# Altium PCB PCB1.pcbdoc
Units mil, origin at the board's own origin, x right, y up, seen from the top; angles counter-clockwise.
Board outline 3030 x 3680 mil, 2 copper layers (Top Layer, Bottom Layer); 7 components, 22 nets, 99 pads, 0 vias.
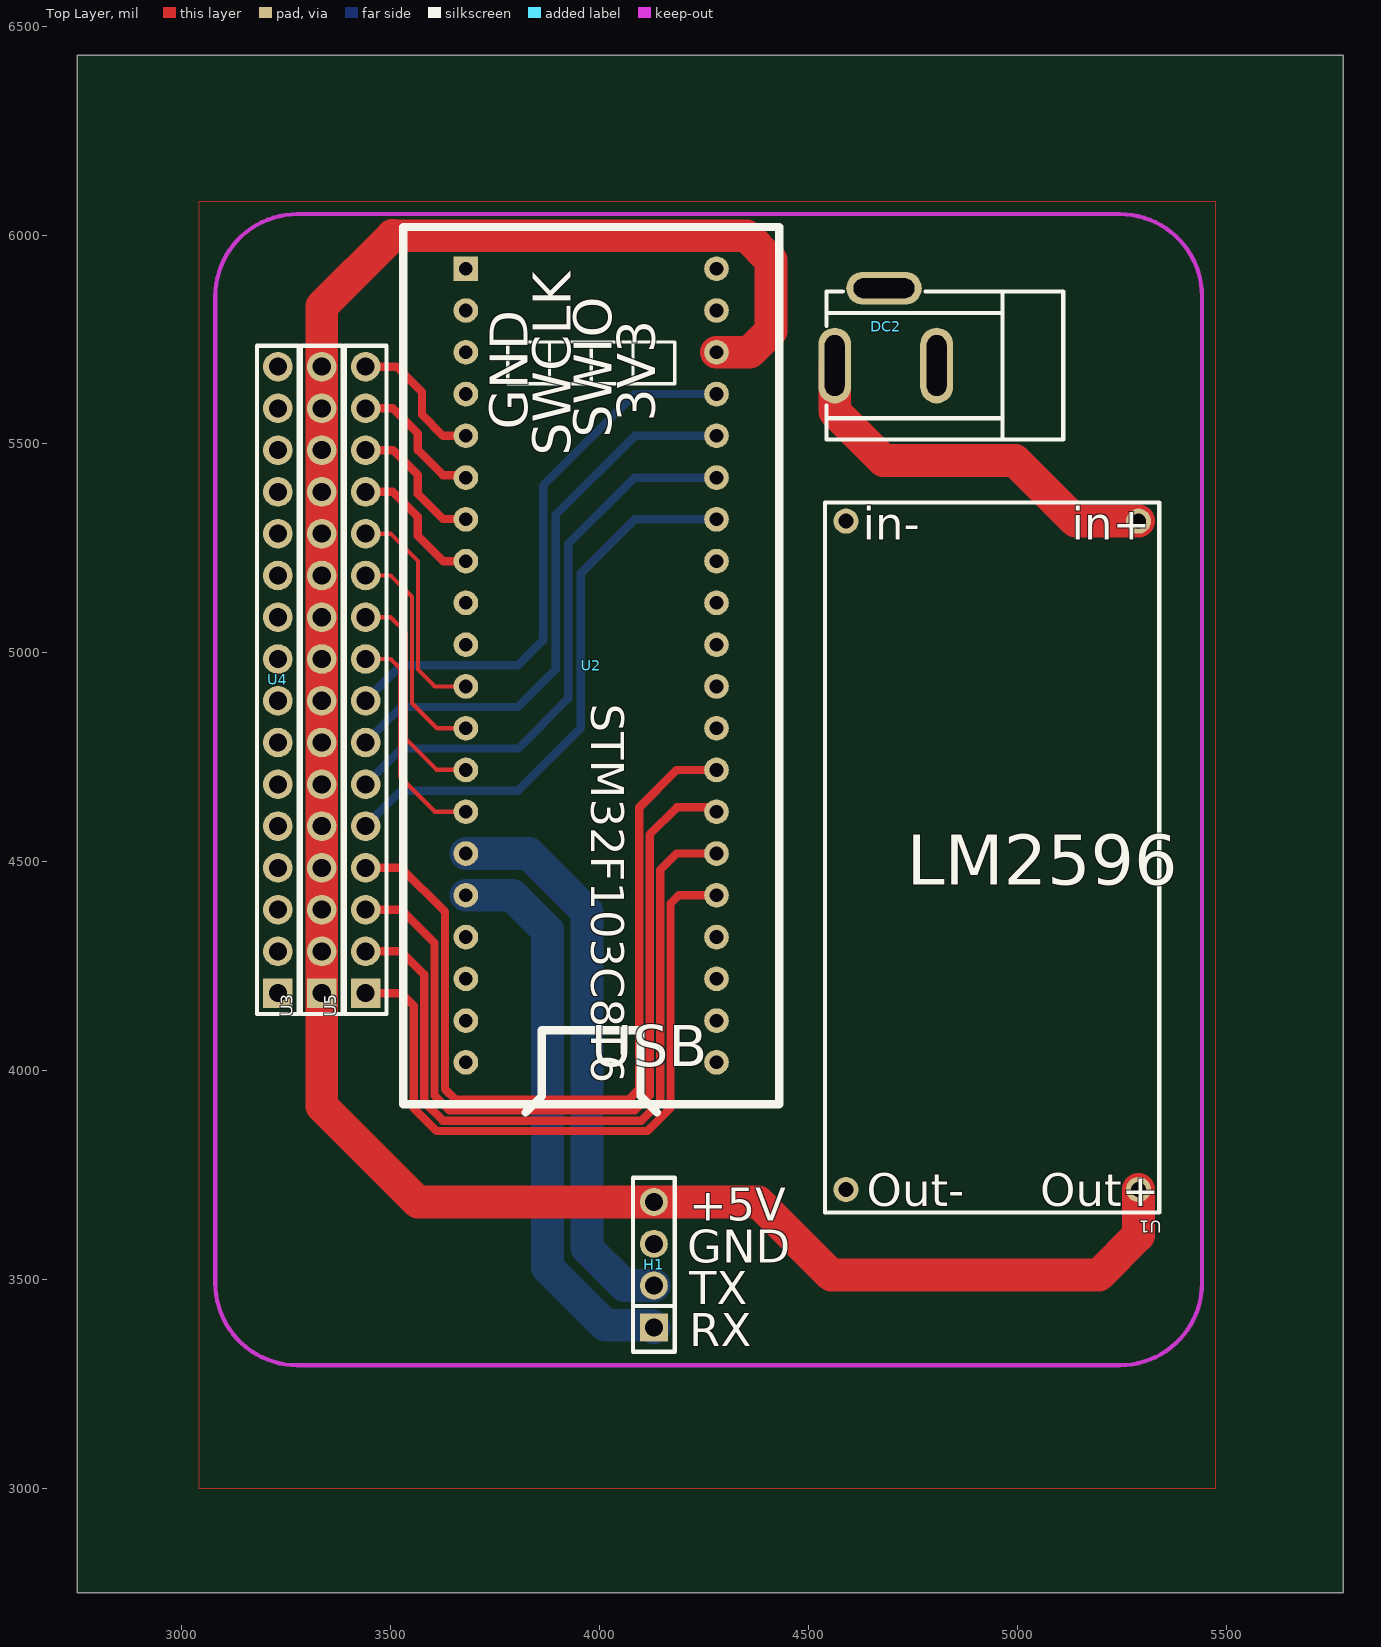
[diagram p0: Top Layer view]
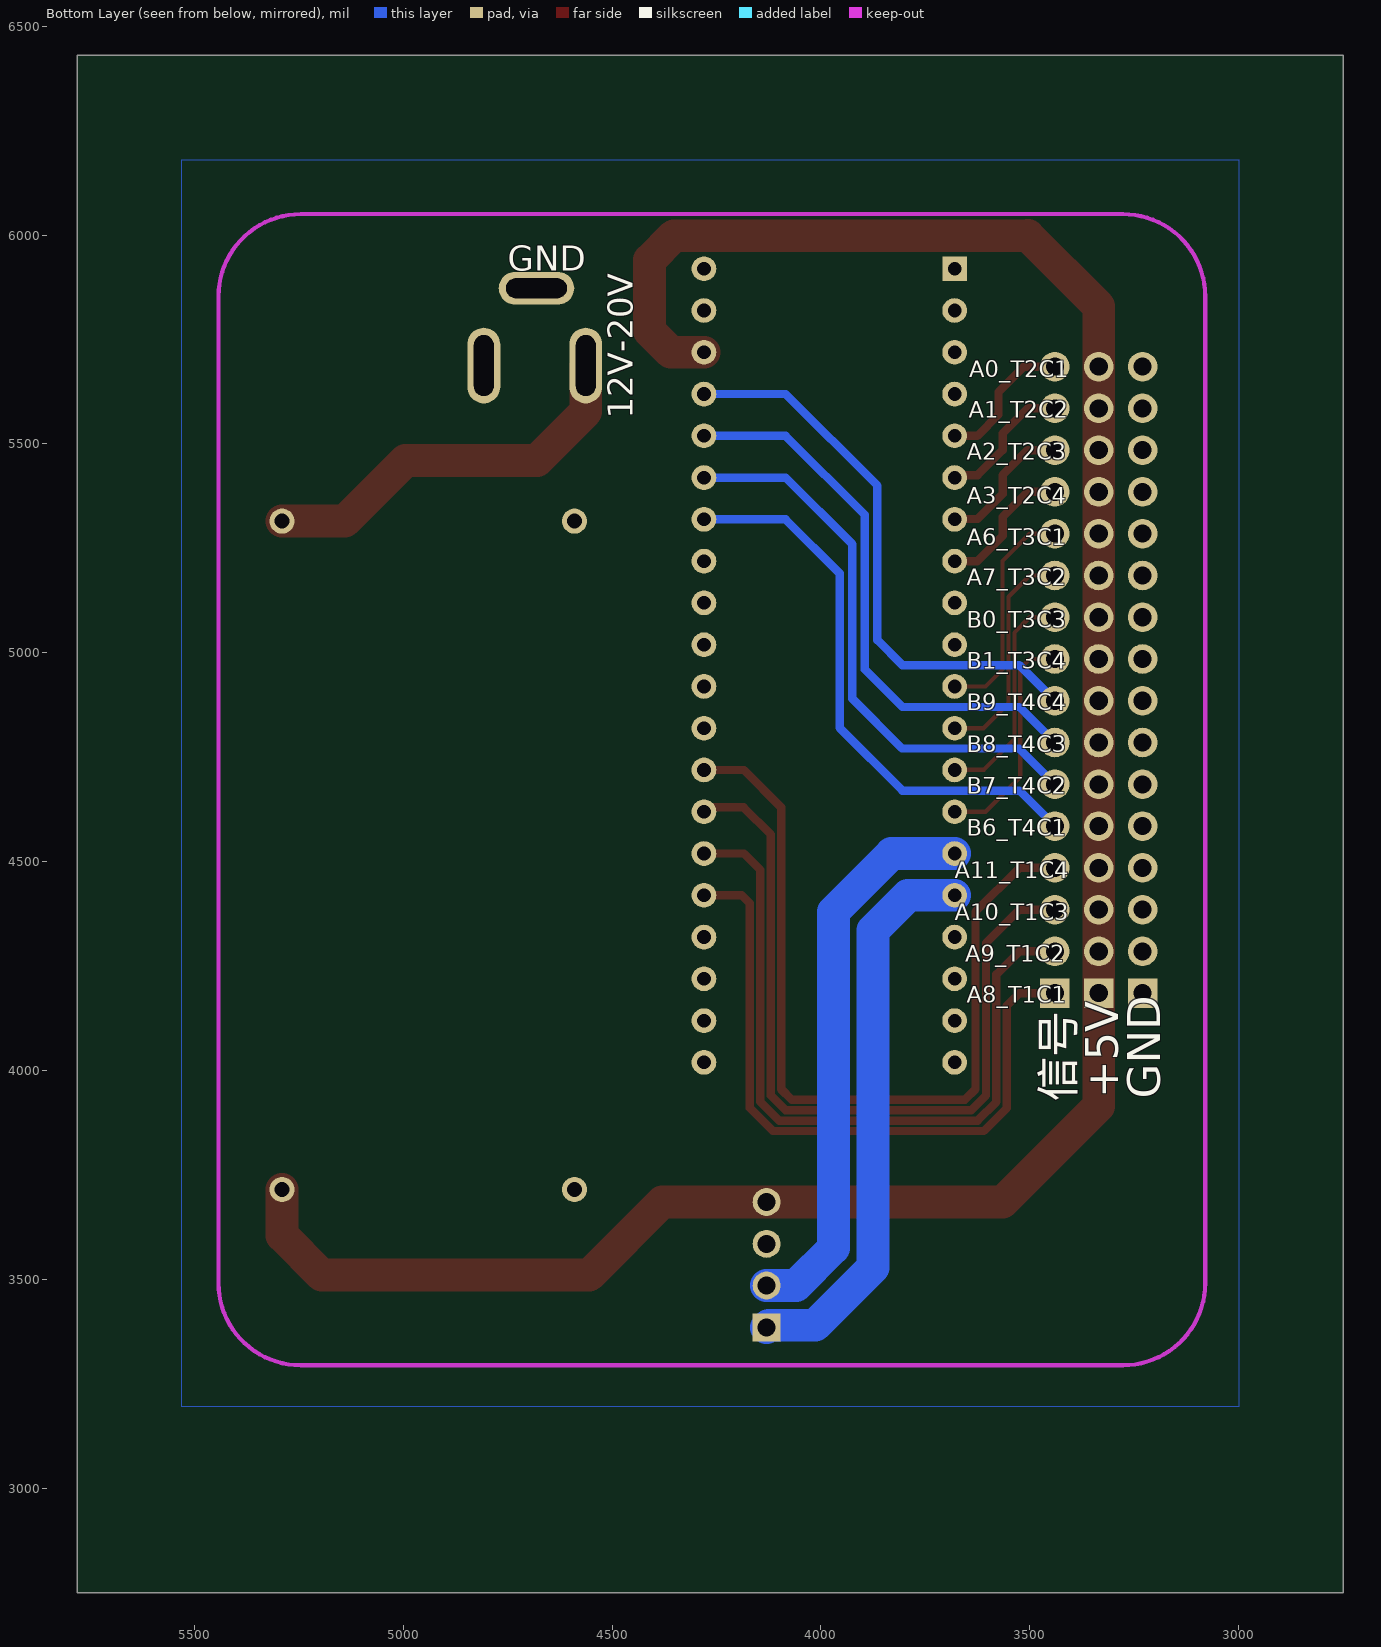
[diagram p1: Bottom Layer view, seen from below]

## Layer stack, top to bottom
Top Layer: signal copper (thickness not stored)
Dielectric: dielectric 12.6, FR-4, Dk 4.8
Bottom Layer: signal copper (thickness not stored)

## Board outline
5780,2750 2750,2750 2750,6430 5780,6430

## Design rules (kind name [scope] priority, off if disabled: settings)
Clearance copperThickness1oz [All] p1: gap=7 ignorepadtopadclearanceinfootprint=FALSE except(4: Track-Track; 6: Track-SMDPad SMDPad-SMDPad Track-THPad SMDPad-THPad THPad-THPad Track-Via SMDPad-Via THPad-Via Via-Via Track-Fill SMDPad-Fill THPad-Fill Via-Fill Fill-Fill SMDPad-Region THPad-Region Via-Region Fill-Region Region-Region Track-Poly SMDPad-Poly THPad-Poly Via-Poly Fill-Poly Poly-Poly Track-Text SMDPad-Text THPad-Text Via-Text Fill-Text Region-Text Poly-Text Text-Text Track-Hole SMDPad-Hole THPad-Hole Via-Hole Fill-Hole Region-Hole Poly-Hole Text-Hole; 11.8: Track-Region Region-Poly Track-Sheet SMDPad-Sheet THPad-Sheet Via-Sheet Fill-Sheet Region-Sheet Poly-Sheet Text-Sheet Sheet-Hole)
Clearance copperThickness2oz [All] p1: gap=7 ignorepadtopadclearanceinfootprint=FALSE except(6: Track-SMDPad SMDPad-SMDPad Track-THPad SMDPad-THPad THPad-THPad Track-Via SMDPad-Via THPad-Via Via-Via Track-Fill SMDPad-Fill THPad-Fill Via-Fill Fill-Fill SMDPad-Region THPad-Region Via-Region Fill-Region Region-Region Track-Poly SMDPad-Poly THPad-Poly Via-Poly Fill-Poly Poly-Poly Track-Text SMDPad-Text THPad-Text Via-Text Fill-Text Region-Text Poly-Text Text-Text Track-Hole SMDPad-Hole THPad-Hole Via-Hole Fill-Hole Region-Hole Poly-Hole Text-Hole; 8: Track-Track; 11.8: Track-Region Region-Poly Track-Sheet SMDPad-Sheet THPad-Sheet Via-Sheet Fill-Sheet Region-Sheet Poly-Sheet Text-Sheet Sheet-Hole)
DiffPairsRouting differentialPair [All] p1: maxuncoupledlength=10 minlimit=0 maxlimit=6 mostfreqgap=6 toplayer_minwidth=5 toplayer_prefwidth=10 toplayer_maxwidth=100 bottomlayer_minwidth=5 bottomlayer_prefwidth=10 bottomlayer_maxwidth=100
PasteMaskExpansion pasteMaskExpansion [All] p1: expansion=0
PlaneConnect innerPlane [All] p1: planeconnectstyle=Relief reliefexpansion=20 reliefentries=4 reliefconductorwidth=10 reliefairgap=10
PolygonConnect copperRegion [All] p1: connectstyle=Relief reliefentries=4 reliefconductorwidth=10 polygonreliefangle="90 Angle" airgapwidth=10
RoutingVias viaSize [All] p1: viastyle="Through Hole" holewidth=12.0078 minholewidth=11.811 maxholewidth=248.0314 width=24.0158 minwidth=19.685 maxwidth=393.7008
SolderMaskExpansion solderMaskExpansion [All] p1: useseparateexpansions=TRUE expansion=2 expansionbottom=2
Width copperThickness1oz [All] p1: maxlimit=100 minlimit=5 preferedwidth=10
Width copperThickness2oz [All] p1: maxlimit=100 minlimit=8 preferedwidth=10

## Components (designator, comment, footprint, x,y, rotation, side; value= is the part's Value field where it differs from the comment)
DC2 "DC-005_2.5" DC-005_2.5 4690,5700 r0 top
H1 "HDR-F_2.54_1x4P" HDR-TH_4P-P2.54-V-F 4130,3535 r90 top
U1 "LM2596" lm2596 5340,5365 r180 top
U2 "stm32f103c8t6最小系统" stm32f103c8t6最小系统 3980,4915 r0 top
U3 "DS1021-1x16SF11-B" HDR-TH_16P-P2.54-V-M 3335,4935 r90 top
U4 "DS1021-1x16SF11-B" HDR-TH_16P-P2.54-V-M 3230,4935 r90 top
U5 "DS1021-1x16SF11-B" HDR-TH_16P-P2.54-V-M 3440,4935 r90 top

## Footprints (in the part's own frame and the unit in brackets; to place one, negate y for a bottom-side part, rotate by r counter-clockwise, add the part's x,y. Pads: shape width x height; smd on the part's side, far side on the other; paste and mask are expansions set on the pad)
DC-005_2.5 [mm]
  oval 2x4.6 hole 1.2 slot 3.7 at 90 deg: 1(-3.227,-0.318) 2(2.973,-0.318)
  oval 4.6x2 hole 1.2 slot 3.7 at 0 deg: 3(-0.227,4.382)
  silkscreen extent -3.73,-4.82 10.67,4.18
HDR-TH_4P-P2.54-V-F [mm]
  rect 1.7x1.7 hole 1.1: 1(-3.81,0)
  round 1.7 hole 1.1: 2(-1.27,0) 3(1.27,0) 4(3.81,0)
  silkscreen extent -5.29,-1.27 5.29,1.27
HDR-TH_16P-P2.54-V-M [mm]
  rect 1.8x1.8 hole 1.1: 1(-19.05,0)
  round 1.8 hole 1.1: 2(-16.51,0) 3(-13.97,0) 4(-11.43,0) 5(-8.89,0) 6(-6.35,0) 7(-3.81,0) 8(-1.27,0) 9(1.27,0) 10(3.81,0) 11(6.35,0) 12(8.89,0) 13(11.43,0) 14(13.97,0) 15(16.51,0) 16(19.05,0)
  silkscreen extent -20.32,-1.27 20.32,1.27
lm2596 [mil]
  round 60 hole 36: 1(50,50) 2(750,50) 3(50,1650) 4(750,1650)
  silkscreen extent 0,5 800,1705
stm32f103c8t6最小系统 [mm]
  rect 1.5x1.5 hole 0.83: 1(-7.62,25.51)
  round 1.5 hole 0.83: 2(-7.62,22.97) 3(-7.62,20.43) 4(-7.62,17.89) 5(-7.62,15.35) 6(-7.62,12.81) 7(-7.62,10.27) 8(-7.62,7.73) 9(-7.62,5.19) 10(-7.62,2.65) 11(-7.62,0.11) 12(-7.62,-2.43) 13(-7.62,-4.97) 14(-7.62,-7.51) 15(-7.62,-10.05) 16(-7.62,-12.59) 17(-7.62,-15.13) 18(-7.62,-17.67) 19(-7.62,-20.21) 20(-7.62,-22.75) 21(7.62,-22.75) 22(7.62,-20.21) 23(7.62,-17.67) 24(7.62,-15.13) 25(7.62,-12.59) 26(7.62,-10.05) 27(7.62,-7.51) 28(7.62,-4.97) 29(7.62,-2.43) 30(7.62,0.11) 31(7.62,2.65) 32(7.62,5.19) 33(7.62,7.73) 34(7.62,10.27) 35(7.62,12.81) 36(7.62,15.35) 37(7.62,17.89) 38(7.62,20.43) 39(7.62,22.97) 40(7.62,25.51)
  silkscreen extent -11.43,-25.79 11.43,28.05

## Nets (pads, with @x,y where several pads share a name; then routed paths per layer and width w, separated by ;. In a path a pad name is that pad's centre, name@x,y a point inside that pad or via, vN(x,y) a via of type N, cw(c..) or ccw(c..) an arc to the next point about the centre after c; other vN are vias at no path point)
+5V: H1.4 U1.3 U2.38 U3.1 U3.2 U3.3 U3.4 U3.5 U3.6 U3.7 U3.8 U3.9 U3.10 U3.11 U3.12 U3.13 U3.14 U3.15 U3.16 | length 5676.5
  Top Layer w78.74: U2.38 4359.33,5719.33 4410,5770 4410,5940 4352.19,5997.81 3504.71,5998.83 3335,5829.12 U3.16 U3.15 U3.14 U3.13 U3.12 U3.11 U3.10 U3.9 U3.8 U3.7 U3.6 U3.5 U3.4 U3.3 U3.2 U3.1 3335,3915 3565,3685 H1.4 4380,3685 4555,3510 5195,3510 5290,3605 U1.3
A0_T2C1: U2.5 U5.16 | length 340.4
  Top Layer w20: U5.16 3514.33,5685 3575,5624.33 3575,5570 3625.67,5519.33 U2.5
A1_T2C2: U2.6 U5.15 | length 332.1
  Top Layer w20: U5.15 3505,5585 3565,5525 3565,5485 3625,5425 3674.33,5425 U2.6
A2_T2C3: U2.7 U5.14 | length 335
  Top Layer w20: U5.14 3505,5485 3565,5425 3565,5380 3625,5320 3679.33,5320 U2.7
A3_T2C4: U2.8 U5.13 | length 335
  Top Layer w20: U5.13 3505,5385 3565,5325 3565,5280 3625.67,5219.33 U2.8
A6_T3C1: U2.11 U5.12 | length 543.8
  Top Layer w10: U5.12 3500,5285 3565,5220 3565,4960 3605.67,4919.33 U2.11
A7_T3C2: U2.12 U5.11 | length 540.8
  Top Layer w10: U5.11 3500,5185 3550.98,5134.02 3550.98,4879.02 3610.67,4819.33 U2.12
A8_T1C1: U2.25 U5.1 | length 1641
  Top Layer w20: U5.1 3525,4185 3555,4155 3555,3910 3610,3855 4115,3855 4170,3910 4170,4400 4189.33,4419.33 U2.25
A9_T1C2: U2.26 U5.2 | length 1776.4
  Top Layer w20: U5.2 3525,4285 3580,4230 3580,3925 3625,3880 4100,3880 4145,3925 4145,4480 4184.33,4519.33 U2.26
A10_T1C3: U2.27 U5.3 | length 1923.5
  Top Layer w20: U5.3 3525,4385 3605,4305 3605,3940 3640,3905 4085,3905 4120,3940 4120,4565 4185,4630 4269.33,4630 U2.27
A11_T1C4: U2.28 U5.4 | length 2041.2
  Top Layer w20: U5.4 3525,4485 3630,4380 3630,3955 3655,3930 4070,3930 4095,3955 4095,4630 4184.33,4719.33 U2.28
B0_T3C3: U2.13 U5.10 | length 540.8
  Top Layer w10: U5.10 3500,5085 3536.97,5048.03 3536.97,4793.03 3610,4720 3679.33,4720 U2.13
B1_T3C4: U2.14 U5.9 | length 543.8
  Top Layer w10: U5.9 3500,4985 3522.95,4962.05 3522.95,4702.05 3605.67,4619.33 U2.14
B6_T4C1: U2.34 U5.5 | length 1360.9
  Bottom Layer w20: U5.5 3525,4670 3805,4670 3955,4820 3955,5190 4084.33,5319.33 U2.34
B7_T4C2: U2.35 U5.6 | length 1360.9
  Bottom Layer w20: U5.6 3525.8,4770.8 3805.8,4770.8 3925,4890 3925,5260 4084.33,5419.33 U2.35
B8_T4C3: U2.36 U5.7 | length 1360.9
  Bottom Layer w20: U5.7 3525,4870 3805,4870 3895,4960 3895,5330 4084.33,5519.33 U2.36
B9_T4C4: U2.37 U5.8 | length 1360.9
  Bottom Layer w20: U5.8 3525,4970 3805,4970 3865,5030 3865,5400 4084.33,5619.33 U2.37
GND: H1.3 U1.4 U2.19 U2.20 U2.39 U4.1 U4.2 U4.3 U4.4 U4.5 U4.6 U4.7 U4.8 U4.9 U4.10 U4.11 U4.12 U4.13 U4.14 U4.15 U4.16
GND1: DC2.2 DC2.3 U1.2
RX: H1.1 U2.16 | length 1351.1
  Bottom Layer w78.74: U2.16 3791.26,4419.33 3875,4335.59 3875,3528.64 4013.64,3390 4125,3390 H1.1
TX: H1.2 U2.15 | length 1350
  Bottom Layer w78.74: U2.15 3830.67,4519.33 3970,4380 3970,3575 4060,3485 H1.2
VCC: DC2.1 U1.1 | length 946
  Top Layer w78.74: DC2.1 4562.96,5577.04 4680,5460 4995,5460 5140,5315 U1.1
pads on no net: U2.1 U2.2 U2.3 U2.4 U2.9 U2.10 U2.17 U2.18 U2.21 U2.22 U2.23 U2.24 U2.29 U2.30 U2.31 U2.32 U2.33 U2.40

## Polygon pours and split planes (outlines as drawn)
GND1 on Bottom Layer (solid, remove dead copper, pour order 2): 3000,3195 5530,3195 5530,6180 3000,6180
GND on Top Layer (solid, remove dead copper, pour order 2): 3040,3000 5475,3000 5475,6080 3040,6080

## Keep-outs
Board Outline Layer:
  lines w10: 3080,3490.94 ccw(c3276.85,3490.94) 3276.85,3294.09 5245.35,3294.09 ccw(c5245.35,3490.94) 5442.2,3490.94 5442.2,5853.15 ccw(c5245.35,5853.15) 5245.35,6050 3276.85,6050 ccw(c3276.85,5853.15) 3080,5853.15 3080,3490.94

## Silkscreen, mask and mechanical layers (free items; w line width, h text height)
Top Silkscreen Layer:
  text "+5V" at 4215,3640 h78.74
  text "GND" at 4210,3540 h78.74
  text "TX" at 4215,3440 h78.74
  text "RX" at 4215,3340 h78.74
Bottom Silkscreen Layer:
  text "GND" at 4750,5915 h59.06
  text "A0_T2C1" at 3645,5660 h39.37
  text "A1_T2C2" at 3646.02,5562.21 h39.37
  text "12V-20V" at 4450,5560 h59.06 r270
  text "A2_T2C3" at 3651.02,5462.21 h39.37
  text "A3_T2C4" at 3651.02,5357.21 h39.37
  text "A6_T3C1" at 3651.02,5257.21 h39.37
  text "A7_T3C2" at 3651.02,5161.5 h39.37
  text "B0_T3C3" at 3651.02,5060.25 h39.37
  text "B1_T3C4" at 3651.02,4961.37 h39.37
  text "B9_T4C4" at 3651.02,4862.21 h39.37
  text "B8_T4C3" at 3651.02,4762.21 h39.37
  text "B7_T4C2" at 3651.02,4662.21 h39.37
  text "B6_T4C1" at 3651.02,4562.21 h39.37
  text "A11_T1C4" at 3680,4460 h39.37
  text "A10_T1C3" at 3680,4360 h39.37
  text "A9_T1C2" at 3655,4260 h39.37
  text "A8_T1C1" at 3651.02,4162.21 h39.37
  text "GND" at 3187.99,3932.65 h78.74 r270
  text "+5V" at 3287.99,3932.85 h78.74 r270
  text "信号" at 3395,3925 h78.74 r270
Mech6:
  lines w10: 3180,3590.94 ccw(c3376.85,3590.94) 3376.85,3394.09 5145.35,3394.09 ccw(c5145.35,3590.94) 5342.2,3590.94 5342.2,5753.15 ccw(c5145.35,5753.15) 5145.35,5950 3376.85,5950 ccw(c3376.85,5753.15) 3180,5753.15 3180,3590.94

## Text inside footprints (layer, text, board x,y; h text height)
U1: Top Silkscreen Layer "in+" at 5130,5270 h78.74; Top Silkscreen Layer "in-" at 4630,5270 h78.74; Top Silkscreen Layer "Out+" at 5055,3675 h78.74; Top Silkscreen Layer "Out-" at 4640,3675 h78.74
U2: Top Silkscreen Layer "USB" at 3980,4009.88 h98.43; Top Silkscreen Layer "GND" at 3828.43,5534.41 h90.55 r90; Top Silkscreen Layer "SWCLK" at 3930.79,5471.16 h90.55 r90; Top Silkscreen Layer "SWIO" at 4029.21,5515.2 h90.55 r90; Top Silkscreen Layer "3V3" at 4133.54,5552.79 h90.55 r90; Top Silkscreen Layer "STM32F103C8T6" at 3980,4877.6 h78.74 r270